# EAGLE board CT_schematic (EAGLE 7.6.0)

Size 100 x 80 mm. Coordinates in mm from the lower left corner, seen from the top.
Outline: 0,0 100,0 100,80 0,80 0,0
Copper layers (1*16): Top 0.035mm / dielectric 1.5mm / Bottom 0.035mm
Design rules "default": minimum track width 10mil, minimum drill 24mil, track to track 8mil, track to pad 8mil, pad to pad 8mil, via to via 8mil, smd to smd 8mil, copper to edge 40mil, drill to drill 8mil, minimum pad ring 10mil, minimum via ring 8mil, stop-mask expansion 4mil, vias tented up to drill 0mil, thermal gap 10mil

## Footprints (pad centres in the part's own frame; a part is rotated, then mirrored left to right if it is on the bottom)
C0603 = smd 0.8 x 0.8: 1 -0.762,0; 2 0.762,0
C0402 = smd 0.5 x 0.5: 1 -0.508,0; 2 0.508,0
C1210 = smd 1.2 x 2.5: 1 -1.524,0; 2 1.524,0
EXV-9H = smd 3.505 x 1.676: 1 -2.857,0; 2 2.857,0
L0603 = smd 0.8 x 0.8: 1 -0.762,0; 2 0.762,0
PJ-037B_PACKAGE = drill 3.7 square: 1 12,0 | drill 3.2 square: 2 6,0
R0603 = smd 0.8 x 0.8: 1 -0.762,0; 2 0.762,0
VFQFPN36 = smd 1.067 x 0.305: 1 -2.832,2; 2 -2.832,1.5; 3 -2.832,1; 4 -2.832,0.5; 5 -2.832,0; 6 -2.832,-0.5; 7 -2.832,-1; 8 -2.832,-1.5; 9 -2.832,-2; 19 2.832,-2; 20 2.832,-1.5; 21 2.832,-1; 22 2.832,-0.5; 23 2.832,0; 24 2.832,0.5; 25 2.832,1; 26 2.832,1.5; 27 2.832,2 | smd 0.305 x 1.067: 10 -2,-2.832; 11 -1.5,-2.832; 12 -1,-2.832; 13 -0.5,-2.832; 14 0,-2.832; 15 0.5,-2.832; 16 1,-2.832; 17 1.5,-2.832; 18 2,-2.832; 28 2,2.832; 29 1.5,2.832; 30 1,2.832; 31 0.5,2.832; 32 0,2.832; 33 -0.5,2.832; 34 -1,2.832; 35 -1.5,2.832; 36 -2,2.832 | smd 4.242 x 4.242: 37 0,0
SOIC-8 = smd 1.6 x 0.6: 1 -2.7,1.905 | smd 1.55 x 0.6: 2 -2.7,0.635; 3 -2.7,-0.635; 4 -2.7,-1.905; 5 2.7,-1.905; 6 2.7,-0.635; 7 2.7,0.635; 8 2.7,1.905
TST-110-05-T-D-RA = drill 1 pad 1.7 square: 1 0,0 | drill 1 pad 1.7: 2 0,2.54; 3 2.54,0; 4 2.54,2.54; 5 5.08,0; 6 5.08,2.54; 7 7.62,0; 8 7.62,2.54; 9 10.16,0; 10 10.16,2.54; 11 12.7,0; 12 12.7,2.54; 13 15.24,0; 14 15.24,2.54; 15 17.78,0; 16 17.78,2.54; 17 20.32,0; 18 20.32,2.54; 19 22.86,0; 20 22.86,2.54
DFN8-S = smd 0.6 x 0.4: 1 -2.69,1.905; 2 -2.69,0.635; 3 -2.69,-0.635; 4 -2.69,-1.905; 5 2.69,-1.905; 6 2.69,-0.635; 7 2.69,0.635; 8 2.69,1.905
SSOP-28 = smd 1.5 x 0.4: 1 -3.625,4.225; 2 -3.625,3.575; 3 -3.625,2.925; 4 -3.625,2.275; 5 -3.625,1.625; 6 -3.625,0.975; 7 -3.625,0.325; 8 -3.625,-0.325; 9 -3.625,-0.975; 10 -3.625,-1.625; 11 -3.625,-2.275; 12 -3.625,-2.925; 13 -3.625,-3.575; 14 -3.625,-4.225; 15 3.625,-4.225; 16 3.625,-3.575; 17 3.625,-2.925; 18 3.625,-2.275; 19 3.625,-1.625; 20 3.625,-0.975; 21 3.625,-0.325; 22 3.625,0.325; 23 3.625,0.975; 24 3.625,1.625; 25 3.625,2.275; 26 3.625,2.925; 27 3.625,3.575; 28 3.625,4.225
182-009-MALE = drill 1.194 pad 1.524 octagon: 1 -5.537,10.923; 2 -2.769,10.923; 3 0,10.923; 4 2.769,10.923; 5 5.537,10.923; 6 -4.153,8.08; 7 -1.384,8.08; 8 1.384,8.08; 9 4.153,8.08 | hole 3.048: -12.446,9.501; 12.446,9.501
ASFL1 = smd 1.7 x 1.5: 1 -1.27,-1.1; 2 1.27,-1.1; 3 1.27,1.1; 4 -1.27,1.1
WSON-8 = smd 0.3 x 0.6: 1 -0.75,0; 2 0.05,0; 3 0.85,0; 4 1.65,0; 5 1.65,3.8; 6 0.85,3.8; 7 0.05,3.8; 8 -0.75,3.8 | smd 3 x 2.6: PAD 0.45,1.9
SON-6 = smd 0.55 x 0.3: 1 -0.355,0.5 | smd 0.52 x 0.3: 2 -0.37,0; 3 -0.37,-0.5; 4 0.37,-0.5; 5 0.37,0; 6 0.37,0.5
SW_4-1437565-2 = smd 1.4 x 2.1: 1 -2.23,4.55; 2 -2.23,-4.55; 3 2.23,4.55; 4 2.23,-4.55
LGM67K-G1J2-24-Z = smd 0.8 x 1.4: A -2,0; C 0,0
NC7SZ125M5X = smd 1.3 x 0.7: 1 -1.3,0.95; 2 -1.3,0; 3 -1.3,-0.95; 4 1.3,-0.95; 5 1.3,0.95
DUMMY_PACKAGE_149 = drill 0.3: 1 0,-1; 2 1.5,-1; 3 3,-1

## Placement (x,y rotation side)
C1  1e-07  [C0603]  -33.02,68.58 0 top  (outside the outline)
C2  1e-07  [C0603]  -36.83,68.58 0 top  (outside the outline)
C3  1e-07  [C0603]  -40.64,68.58 0 top  (outside the outline)
C4  4.7e-06  [C0603]  -29.21,68.58 0 top  (outside the outline)
C5  1e-07  [C0603]  -44.45,68.58 0 top  (outside the outline)
C6  1e-07  [C0603]  -48.26,68.58 0 top  (outside the outline)
C7  1e-08  [C0603]  -52.07,68.58 0 top  (outside the outline)
C8  1e-06  [C0603]  -55.88,68.58 0 top  (outside the outline)
C9  1e-08  [C0402]  -34.29,73.66 0 top  (outside the outline)
C10  1e-07  [C0402]  -38.1,73.66 0 top  (outside the outline)
C11  1e-07  [C0402]  -41.91,73.66 0 top  (outside the outline)
C12  1e-08  [C0402]  -45.72,73.66 0 top  (outside the outline)
C13  1e-07  [C0402]  -49.53,73.66 0 top  (outside the outline)
C14  1e-07  [C0402]  -53.34,73.66 0 top  (outside the outline)
C15  1e-07  [C0402]  -57.15,73.66 0 top  (outside the outline)
C16  1e-07  [C0402]  -60.96,73.66 0 top  (outside the outline)
C17  1e-07  [C0402]  -64.77,73.66 0 top  (outside the outline)
C18  1e-08  [C0402]  -68.58,73.66 0 top  (outside the outline)
C19  1e-08  [C0402]  -72.39,73.66 0 top  (outside the outline)
C20  1e-05  [C1210]  -29.21,57.15 0 top  (outside the outline)
C21  1e-05  [C1210]  -35.56,57.15 0 top  (outside the outline)
C22  1e-07  [C0402]  -15.24,78.74 0 top  (outside the outline)
C23  0.0001  [EXV-9H]  -54.61,49.53 0 top  (outside the outline)
C24  0.0001  [EXV-9H]  -66.04,49.53 0 top  (outside the outline)
C25  1e-08  [C0402]  -19.05,78.74 0 top  (outside the outline)
C26  1e-08  [C0402]  -22.86,78.74 0 top  (outside the outline)
F1  240.0  [L0603]  -59.69,68.58 0 top  (outside the outline)
J1  PJ-037B  [PJ-037B_PACKAGE]  -27.94,29.21 0 top  (outside the outline)
R1  10000.0  [R0603]  -73.66,55.88 0 top  (outside the outline)
R2  1000.0  [R0603]  -63.5,68.58 0 top  (outside the outline)
R3  1600.5  [R0603]  -67.31,68.58 0 top  (outside the outline)
R4  4700.0  [R0603]  -71.12,68.58 0 top  (outside the outline)
R5  2200.0  [R0603]  -15.24,73.66 0 top  (outside the outline)
R6  2200.0  [R0603]  -19.05,73.66 0 top  (outside the outline)
R7  10000.0  [R0603]  -15.24,63.5 0 top  (outside the outline)
R8  10000.0  [R0603]  -20.32,63.5 0 top  (outside the outline)
R9  10000.0  [R0603]  -25.4,63.5 0 top  (outside the outline)
R10  10000.0  [R0603]  -30.48,63.5 0 top  (outside the outline)
R11  10000.0  [R0603]  -35.56,63.5 0 top  (outside the outline)
R12  10000.0  [R0603]  -40.64,63.5 0 top  (outside the outline)
R13  10000.0  [R0603]  -45.72,63.5 0 top  (outside the outline)
R14  10000.0  [R0603]  -50.8,63.5 0 top  (outside the outline)
R15  10000.0  [R0603]  -55.88,63.5 0 top  (outside the outline)
R16  10000.0  [R0603]  -60.96,63.5 0 top  (outside the outline)
R17  10000.0  [R0603]  -66.04,63.5 0 top  (outside the outline)
R18  10000.0  [R0603]  -71.12,63.5 0 top  (outside the outline)
R19  10000.0  [R0603]  -15.24,68.58 0 top  (outside the outline)
R20  100000.0  [R0603]  -53.34,55.88 0 top  (outside the outline)
R21  100000.0  [R0603]  -58.42,55.88 0 top  (outside the outline)
R22  2231.0  [R0603]  -22.86,73.66 0 top  (outside the outline)
R23  1000.0  [R0603]  -26.67,73.66 0 top  (outside the outline)
R24  10000.0  [R0603]  -20.32,68.58 0 top  (outside the outline)
R25  10000.0  [R0603]  -25.4,68.58 0 top  (outside the outline)
R26  9100.0  [R0603]  -30.48,73.66 0 top  (outside the outline)
R27  680000.0  [R0603]  -63.5,55.88 0 top  (outside the outline)
R28  120000.0  [R0603]  -68.58,55.88 0 top  (outside the outline)
U1  stm32f103t6u7  [VFQFPN36]  -69.85,40.64 0 top  (outside the outline)
U2  AT25320B-SSHL-T  [SOIC-8]  -24.13,40.64 0 top  (outside the outline)
U3  TST-110-05-T-D-RA  [TST-110-05-T-D-RA]  -46.99,46.99 0 top  (outside the outline)
U4  24AA256-I/MF  [DFN8-S]  -58.42,27.94 0 top  (outside the outline)
U5  ST3241EBPR  [SSOP-28]  -58.42,7.62 0 top  (outside the outline)
U6  182-009-113R531  [182-009-MALE]  -36.83,6.35 0 top  (outside the outline)
U7  ASFL1-25MHZ-NCS  [ASFL1]  -62.23,40.64 0 top  (outside the outline)
U8  LP3878SDX-ADJ/NOPB  [WSON-8]  -45.72,39.37 0 top  (outside the outline)
U9  TPS3895ADRYR  [SON-6]  -31.75,77.47 0 top  (outside the outline)
U10  4-1437565-2  [SW_4-1437565-2]  -44.45,27.94 0 top  (outside the outline)
U11  Q65110A2395  [LGM67K-G1J2-24-Z]  -17.78,57.15 0 top  (outside the outline)
U12  nc7sz125m5x  [NC7SZ125M5X]  -40.64,55.88 0 top  (outside the outline)
U13  nc7sz125m5x  [NC7SZ125M5X]  -46.99,55.88 0 top  (outside the outline)
U14  Dummy  [DUMMY_PACKAGE_149]  -29.21,78.74 0 top  (outside the outline)

## Library data of the parts
C1-C26 F1 J1 R1-R28 U1-U14 = circuit_tree

## Nets
CLK_U1_2: U1.2 U7.3
GND: C1.2 C2.2 C3.2 C4.2 C5.2 C6.2 C7.2 C8.2 C9.2 C10.2 C11.2 C12.2 C13.2 C16.2 C17.2 C18.2 C19.2 C20.2 C21.2 C22.2 C23.2 C24.2 C25.2 C26.2 J1.2 R2.2 R7.2 R16.2 R17.2 R18.2 R23.2 R26.2 R28.2 U1.5 U1.18 U1.26 U1.36 U1.37 U2.4 U3.4 U3.6 U3.8 U3.10 U3.12 U3.14 U3.16 U3.18 U3.20 U4.4 U5.23 U5.25 U6.5 U7.2 U8.3 U8.PAD U9.2 U11.C U12.2 U12.3 U13.1 U13.3 U14.1
NET_U1_4: R4.1 U1.4 U13.4
NET_U1_6: C7.1 C8.1 F1.1 U1.6
NET_U1_31: R3.1 U1.31 U11.A
NET_U1_32: R1.1 U1.32 U10.3 U10.4
NET_U1_33: R5.1 U1.33 U4.6
NET_U1_34: R6.1 U1.34 U4.5
NET_U1_35: R7.1 U1.35
NET_U2_3: R8.1 U2.3
NET_U2_7: R10.1 U2.7
NET_U3_3: R11.1 U3.3
NET_U3_7: R13.1 U3.7
NET_U3_9: R14.1 U3.9
NET_U3_19: R16.1 U3.19
NET_U4_1: R17.1 U4.1
NET_U4_2: R18.1 U4.2
NET_U4_3: R19.1 U4.3
NET_U5_1: C15.1 U5.1
NET_U5_2: C15.2 U5.2
NET_U5_3: C17.1 U5.3
NET_U5_22: R20.1 U5.22
NET_U5_24: C14.2 U5.24
NET_U5_27: C16.1 U5.27
NET_U5_28: C14.1 U5.28
NET_U6_2: U5.4 U6.2
NET_U6_3: U5.9 U6.3
NET_U6_7: U5.5 U6.7
NET_U6_8: U5.10 U6.8
NET_U8_1: C19.1 U8.1
NET_U8_6: R22.2 R23.1 U8.6
NET_U8_8: R21.1 U8.8
NET_U9_1: R25.1 R26.1 U9.1
NET_U9_3: R27.2 R28.1 U9.3
NET_U9_4: R24.1 U9.4 U12.4 U13.2
NET_U10_1: R2.1 U10.1 U10.2
PROC_SPI1_MISO: U1.13 U2.2
PROC_SPI1_MOSI: U1.14 U2.5
PROC_SPI1_NSS: R9.1 U1.11 U2.1
PROC_SPI1_SCK: U1.12 U2.6
PROC_SYS_JTDI: R12.1 U1.29 U3.5
PROC_SYS_JTDO_TRACESWO: U1.30 U3.13
PROC_TIM1_CH2N: U1.15 U14.3
PROC_TIM1_CH3N: U1.16 U14.2
PROC_USART1_CTS: U1.23 U5.13
PROC_USART1_RTS: U1.24 U5.18
PROC_USART1_RX: U1.22 U5.19
PROC_USART1_TX: U1.21 U5.14
RST_OUT_U3_SRESET_B: R15.1 U3.15 U12.1
VCC_S1_14V9: C20.1 C23.1 C24.1 J1.1 R21.2 U8.4
VCC_TIER1_3V3: C1.1 C2.1 C3.1 C4.1 C5.1 C6.1 C9.1 C10.1 C11.1 C12.1 C13.1 C18.1 C21.1 C22.1 C25.1 C26.1 F1.2 R1.2 R3.2 R4.2 R5.2 R6.2 R8.2 R9.2 R10.2 R11.2 R12.2 R13.2 R14.2 R15.2 R19.2 R20.2 R22.1 R24.2 R25.2 R27.1 U1.1 U1.19 U1.27 U2.8 U3.1 U3.2 U4.7 U4.8 U5.26 U7.4 U8.5 U9.6 U12.5 U13.5

## Tracks (layer width: path | path; a pad name or v marks a point on that pad's centre or on a via)
CLK_U1_2  (1 unrouted)
GND  (61 unrouted)
NET_U1_4  (2 unrouted)
NET_U1_6  (3 unrouted)
NET_U1_31  (2 unrouted)
NET_U1_32  (3 unrouted)
NET_U1_33  (2 unrouted)
NET_U1_34  (2 unrouted)
NET_U1_35  (1 unrouted)
NET_U2_3  (1 unrouted)
NET_U2_7  (1 unrouted)
NET_U3_3  (1 unrouted)
NET_U3_7  (1 unrouted)
NET_U3_9  (1 unrouted)
NET_U3_19  (1 unrouted)
NET_U4_1  (1 unrouted)
NET_U4_2  (1 unrouted)
NET_U4_3  (1 unrouted)
NET_U5_1  (1 unrouted)
NET_U5_2  (1 unrouted)
NET_U5_3  (1 unrouted)
NET_U5_22  (1 unrouted)
NET_U5_24  (1 unrouted)
NET_U5_27  (1 unrouted)
NET_U5_28  (1 unrouted)
NET_U6_2  (1 unrouted)
NET_U6_3  (1 unrouted)
NET_U6_7  (1 unrouted)
NET_U6_8  (1 unrouted)
NET_U8_1  (1 unrouted)
NET_U8_6  (2 unrouted)
NET_U8_8  (1 unrouted)
NET_U9_1  (2 unrouted)
NET_U9_3  (2 unrouted)
NET_U9_4  (3 unrouted)
NET_U10_1  (2 unrouted)
PROC_SPI1_MISO  (1 unrouted)
PROC_SPI1_MOSI  (1 unrouted)
PROC_SPI1_NSS  (2 unrouted)
PROC_SPI1_SCK  (1 unrouted)
PROC_SYS_JTDI  (2 unrouted)
PROC_SYS_JTDO_TRACESWO  (1 unrouted)
PROC_TIM1_CH2N  (1 unrouted)
PROC_TIM1_CH3N  (1 unrouted)
PROC_USART1_CTS  (1 unrouted)
PROC_USART1_RTS  (1 unrouted)
PROC_USART1_RX  (1 unrouted)
PROC_USART1_TX  (1 unrouted)
RST_OUT_U3_SRESET_B  (2 unrouted)
VCC_S1_14V9  (5 unrouted)
VCC_TIER1_3V3  (49 unrouted)